# Altium PCB Solar_ESC_AM32.PcbDoc
Units mm, origin at the board's own origin, x right, y up, seen from the top; angles counter-clockwise.
Board outline 49.83 x 19.87 mm, 6 copper layers (Top Layer, GND1, Signal, Power, GND2, Bottom Layer), stack 1.597 mm thick; 69 components, 41 nets, 230 pads, 442 vias.
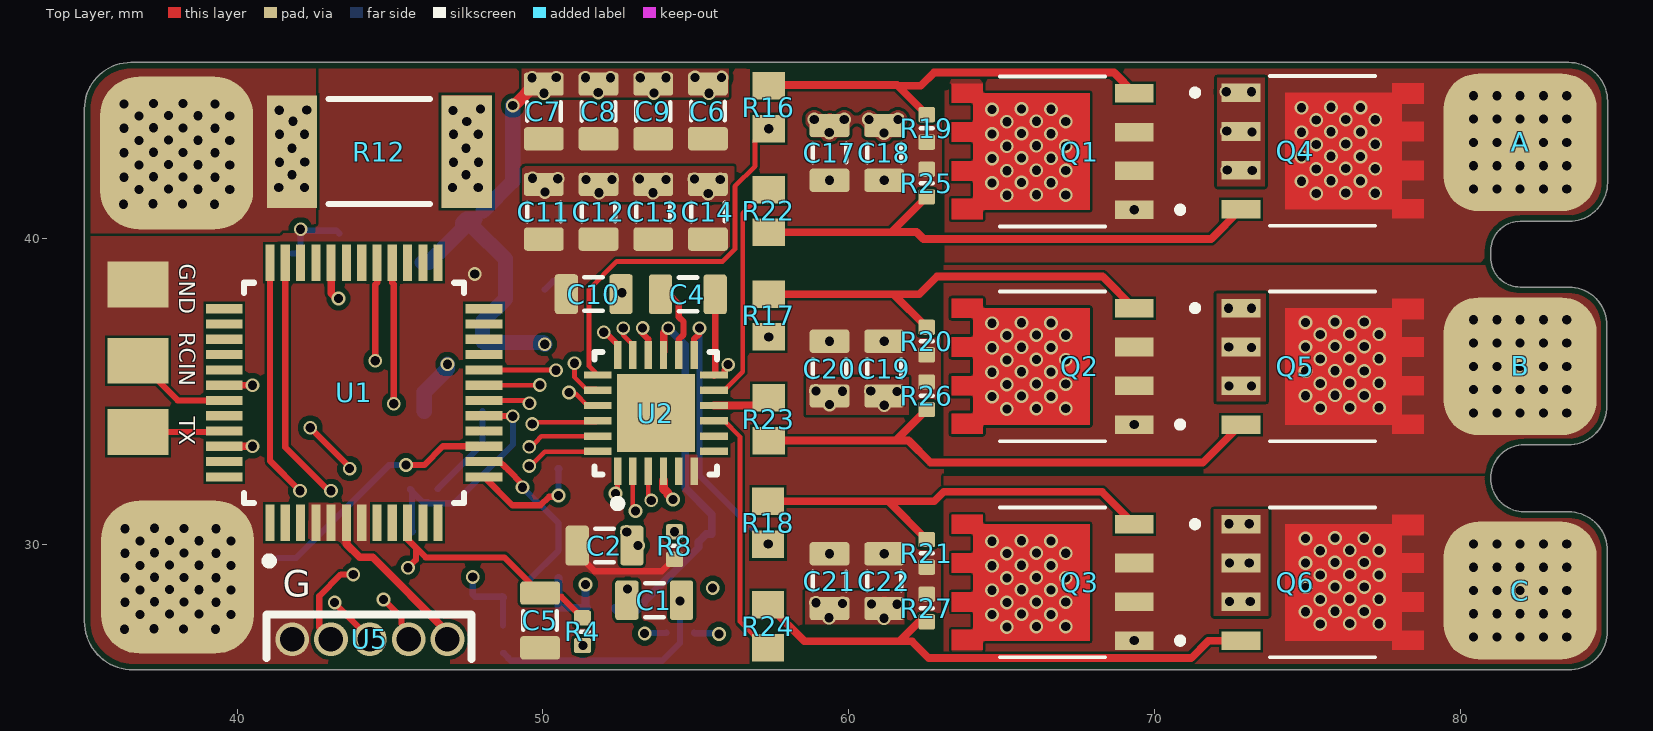
[diagram p0: Top Layer view]
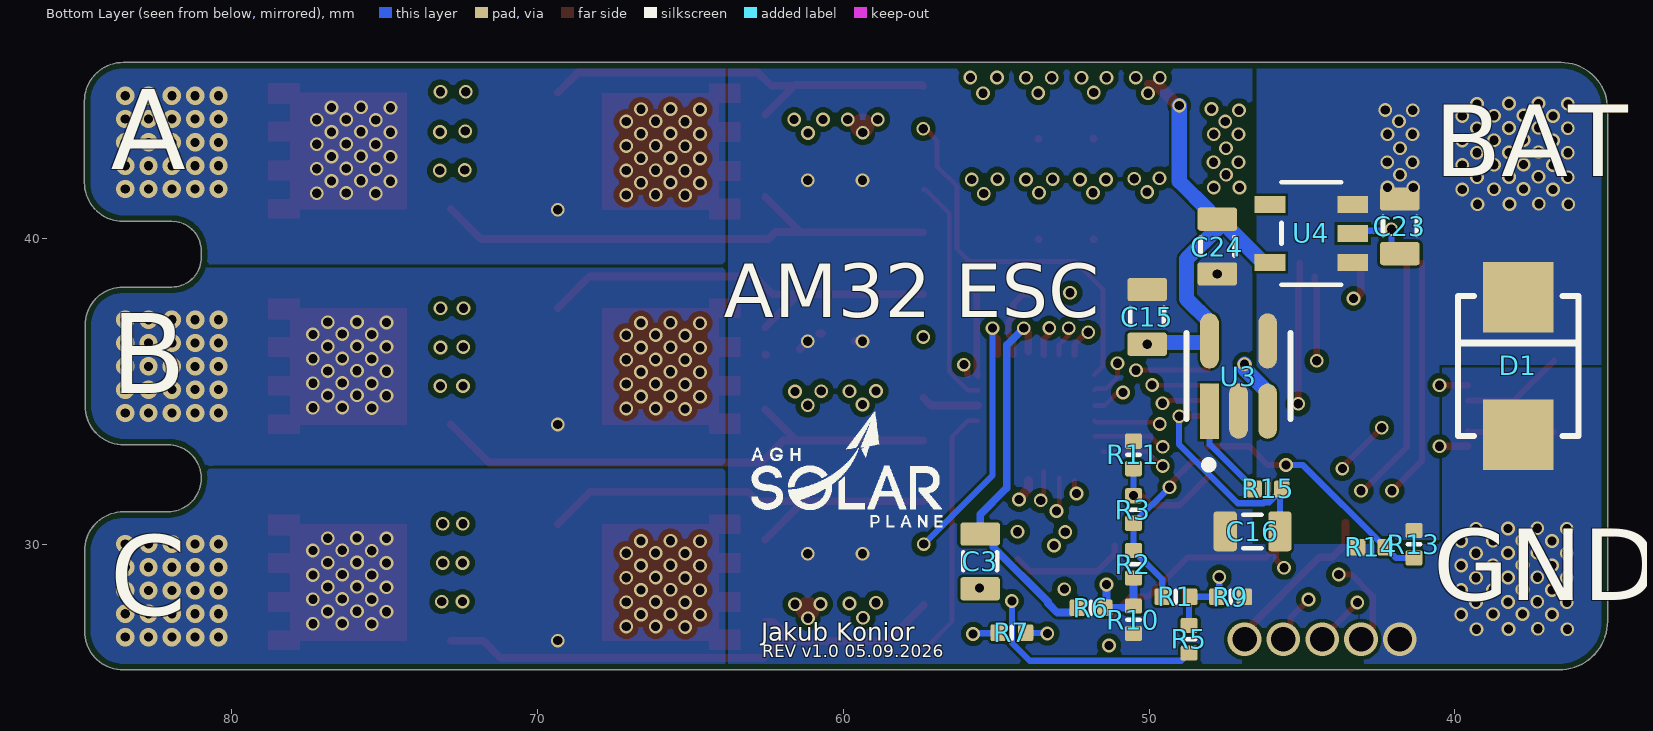
[diagram p1: Bottom Layer view, seen from below]
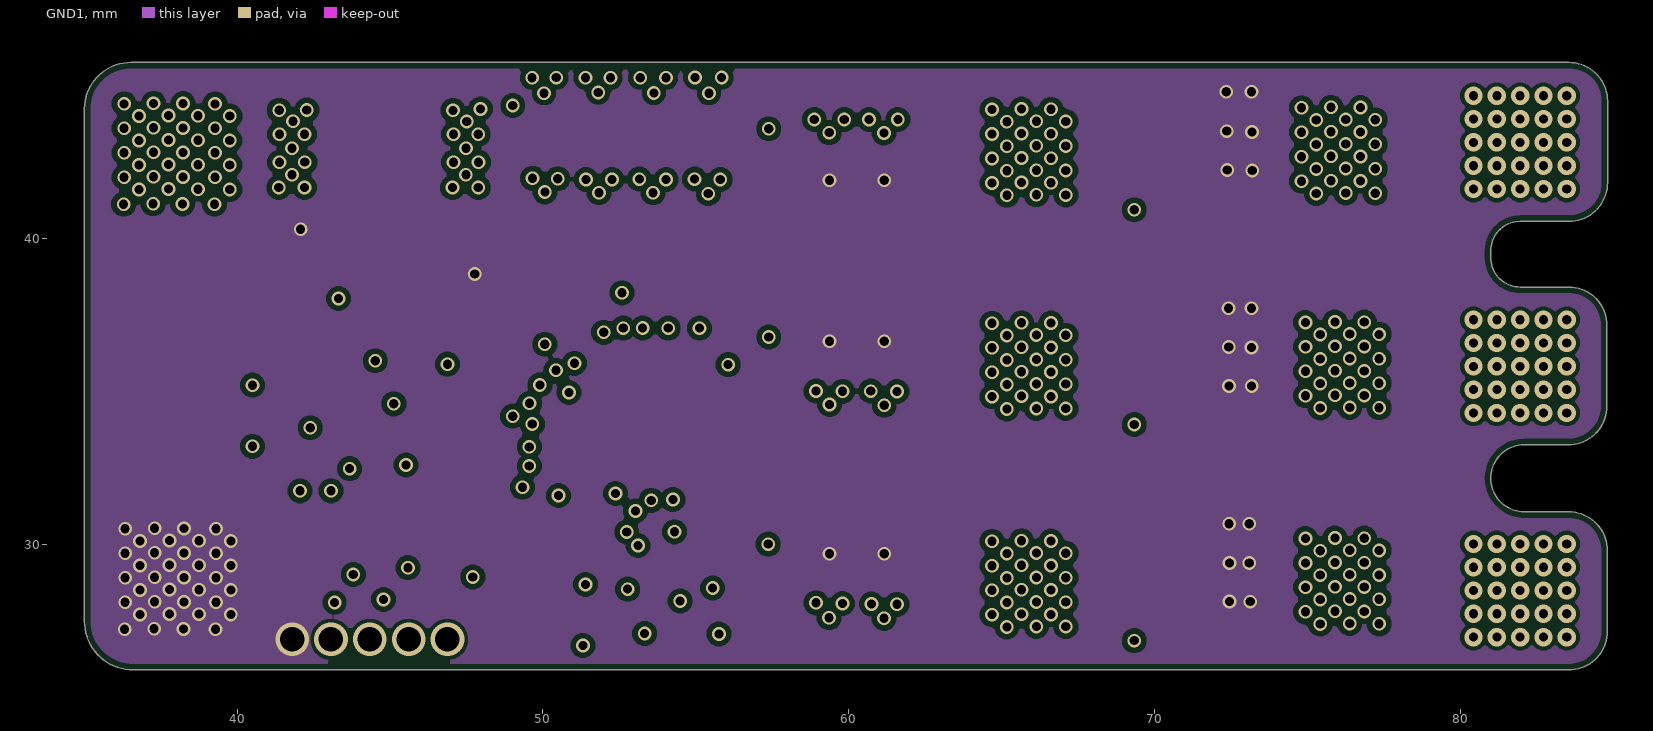
[diagram p2: GND1]
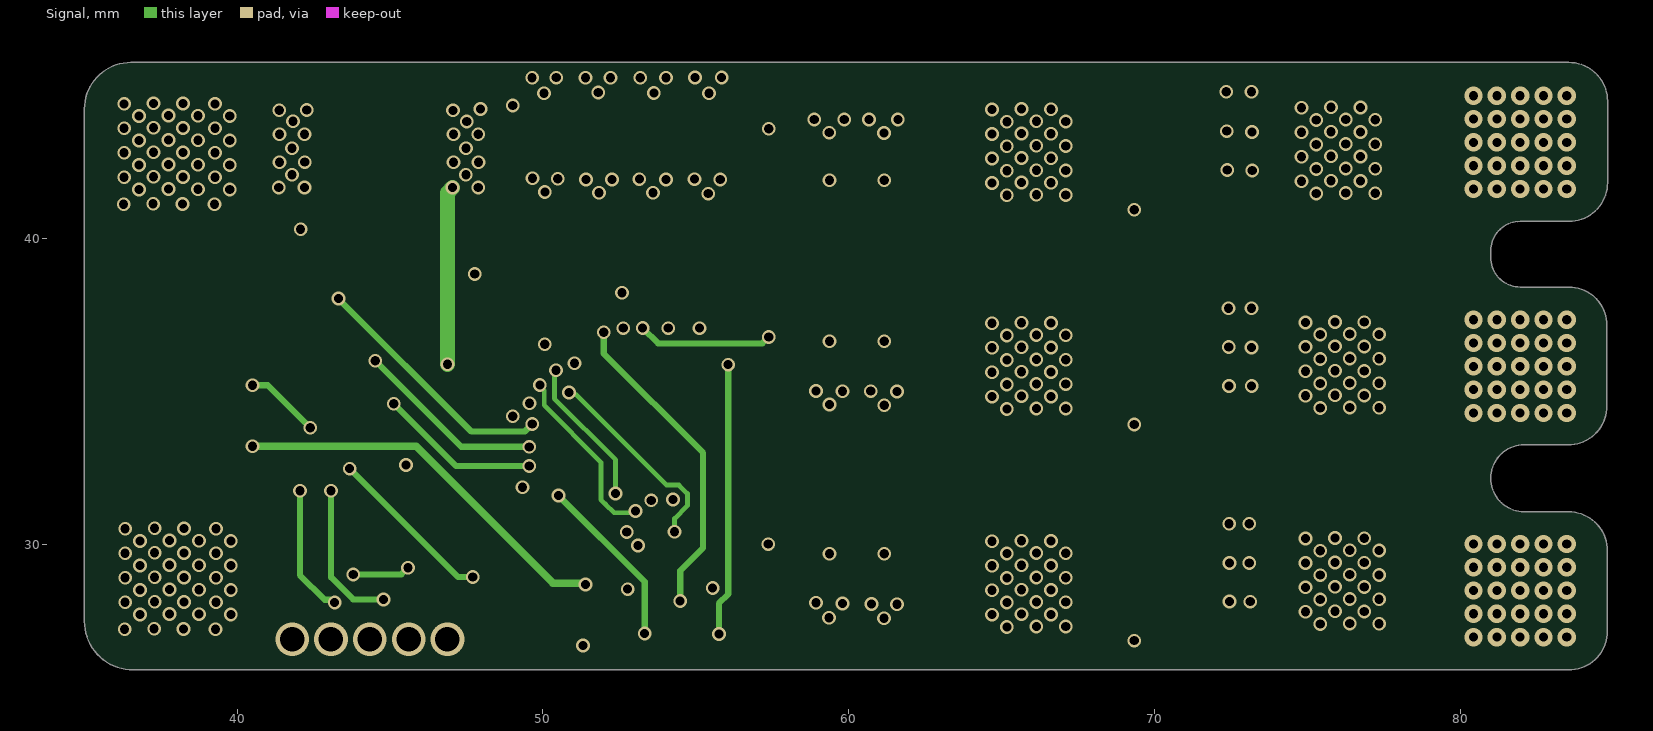
[diagram p3: Signal]
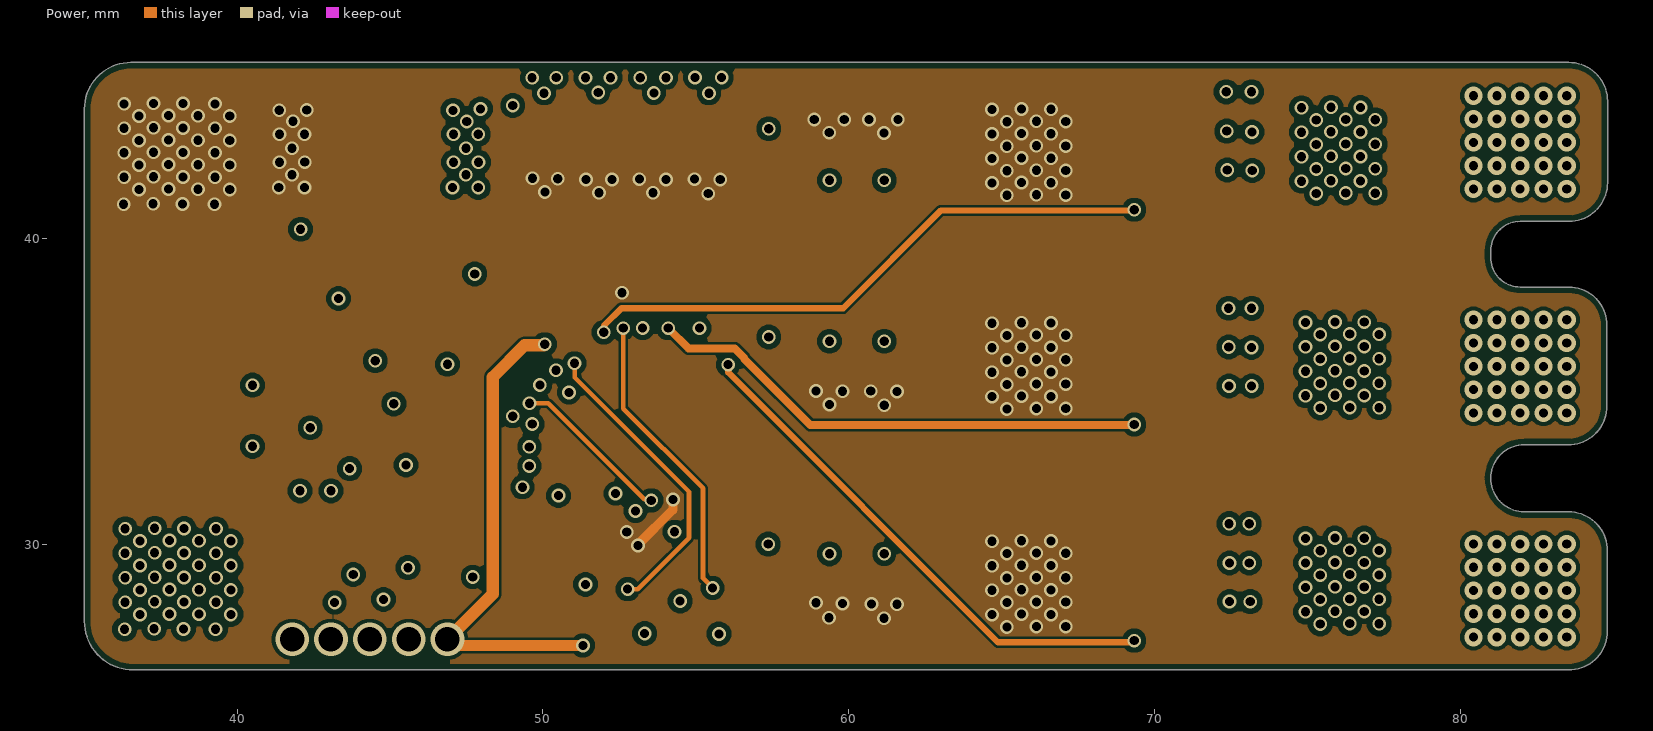
[diagram p4: Power]
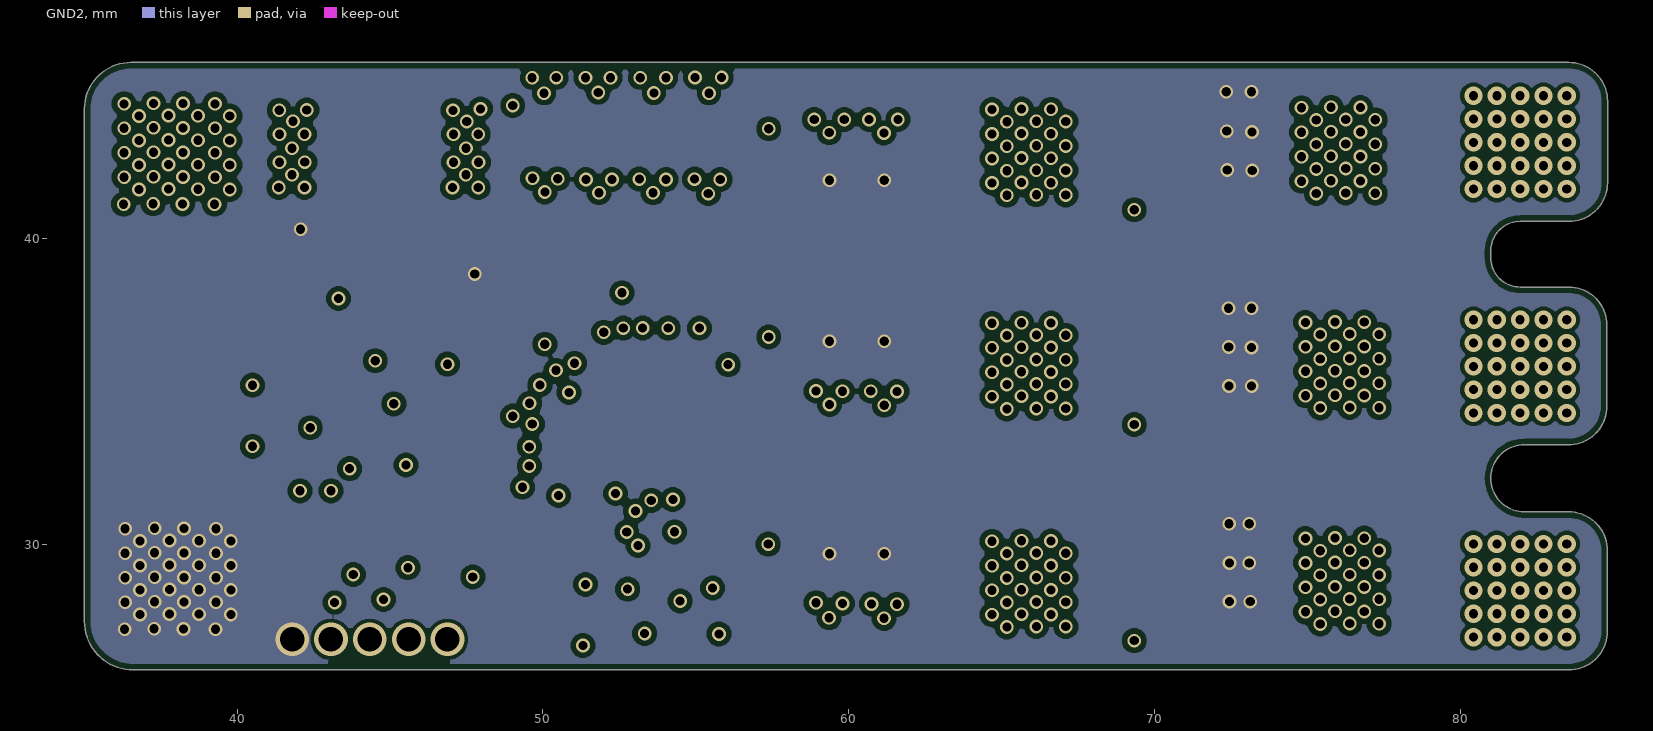
[diagram p5: GND2]
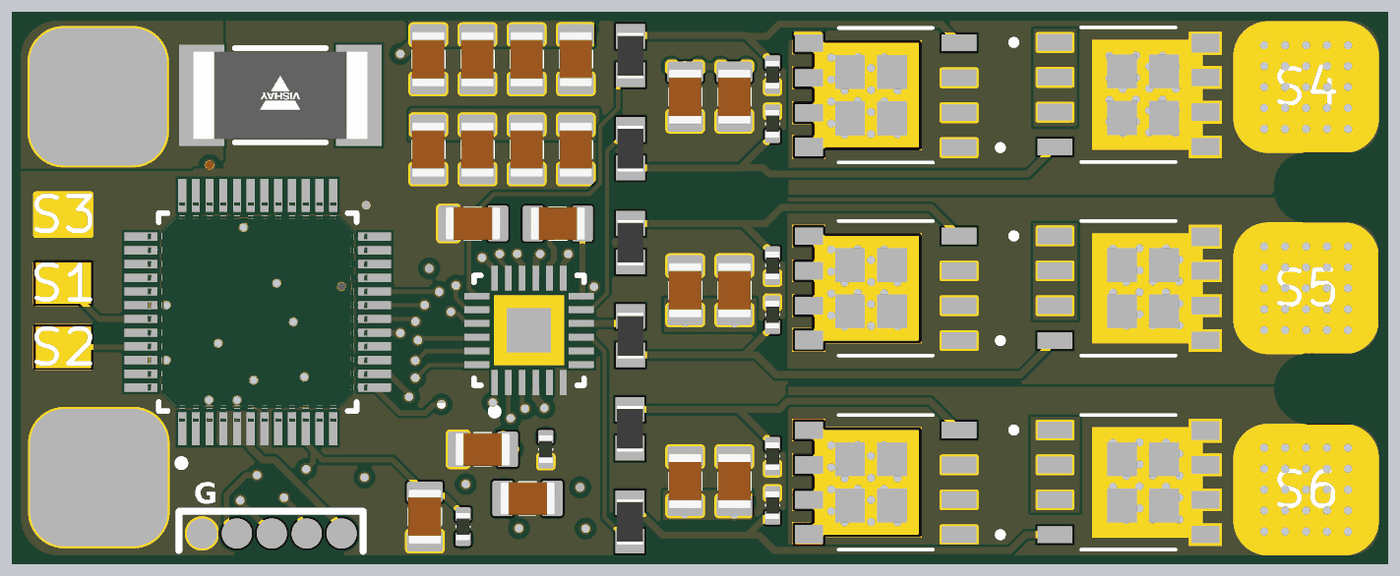
[diagram p6: 3D render of the assembled board from above, using the file's embedded part models]
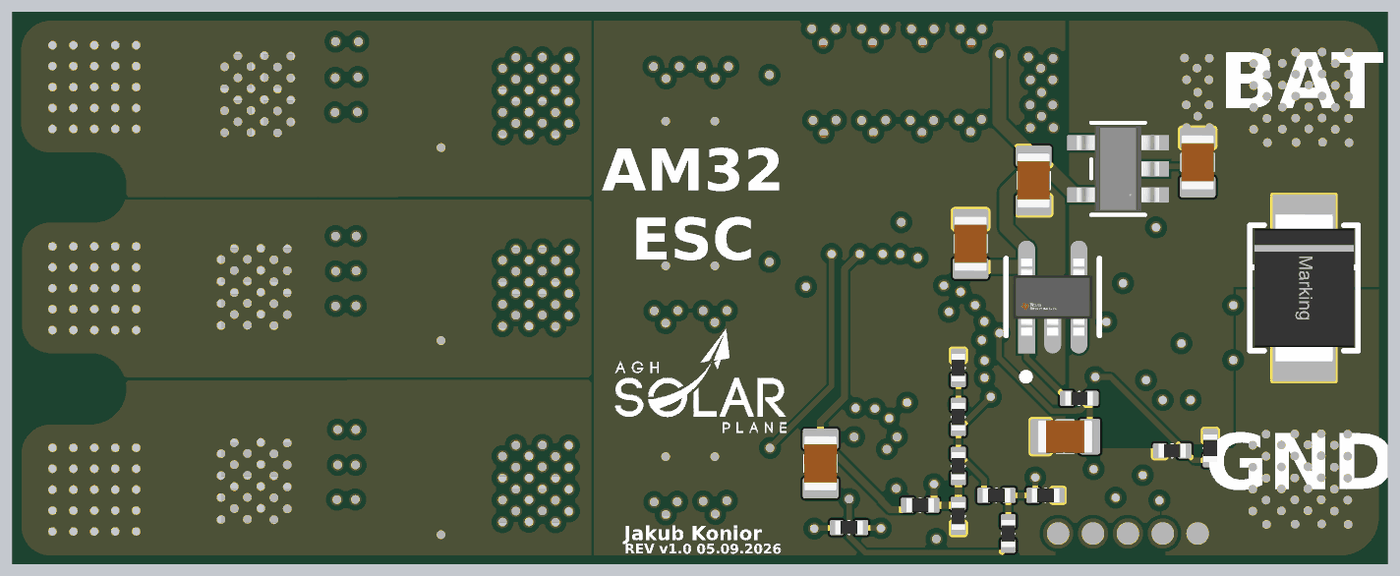
[diagram p7: 3D render of the assembled board from below, using the file's embedded part models]

## Layer stack, top to bottom
Top Solder: solder mask 0.0127, Solder Resist, Dk 3.8
Top Layer: signal copper 0.035
Dielectric 1: prepreg 0.1, 2313, Dk 4.05
GND1: signal copper 0.0175
Core 1: core 0.565, FR-4, Dk 4.5
Signal: signal copper 0.0175
Dielectric 2: prepreg 0.127, 2116, Dk 4.25
Power: signal copper 0.0175
Core 2: core 0.565, FR-4, Dk 4.5
GND2: signal copper 0.0175
Dielectric 3: prepreg 0.1, 2313, Dk 4.05
Bottom Layer: signal copper 0.035
Bottom Solder: solder mask 0.0127, Solder Resist, Dk 3.8

## Board outline
35,27.5 ccw(c36.599,27.5) 36.599,25.901 83.549,25.901 ccw(c83.549,27.171) 84.819,27.171 84.819,29.804 ccw(c83.549,29.804) 83.549,31.074 82.101,31.074 cw(c82.101,32.174) 81.001,32.174 cw(c82.092,32.174) 82.092,33.266 83.533,33.266 ccw(c83.533,34.536) 84.803,34.536 84.803,37.18 ccw(c83.555,37.18) 83.555,38.428 81.964,38.428 cw(c81.964,39.391) 81.001,39.391 81.001,39.611 cw(c81.964,39.611) 81.964,40.574 83.555,40.574 ccw(c83.555,41.844) 84.825,41.844 84.825,44.505 ccw(c83.555,44.505) 83.555,45.775 83.455,45.775 83.453,45.773 36.523,45.773 ccw(c36.523,44.25) 35,44.25

## Design rules (kind name [scope] priority, off if disabled: settings)
BoardOutlineClearance [All] p1: gap=0.2 ignorepadtopadclearanceinfootprint=FALSE
Clearance [All] p1: gap=0.089 ignorepadtopadclearanceinfootprint=FALSE except(0.127: Arc-Via Track-Via SMDPad-Via THPad-Via Via-Via Via-Fill Via-Poly Via-Region Via-Text; 0.25: Arc-Hole Track-Hole SMDPad-Hole THPad-Hole Via-Hole Fill-Hole Poly-Hole Region-Hole Text-Hole)
ComponentClearance [All] p1: gap=0.089 collisioncheckmode=3 verticalgap=0.089 showdistances=TRUE
DiffPairsRouting [All] p1: maxlimit=0.089 minlimit=0.089 mostfreqgap=0.089 toplayer_minwidth=0.089 toplayer_maxwidth=1816.048 toplayer_prefwidth=0.089 midlayer1_minwidth=0.089 midlayer1_maxwidth=1816.048 midlayer1_prefwidth=0.089 midlayer2_minwidth=0.089 midlayer2_maxwidth=1816.048 midlayer2_prefwidth=0.089 midlayer3_minwidth=0.089 midlayer3_maxwidth=1816.048 midlayer3_prefwidth=0.089 midlayer4_minwidth=0.089 midlayer4_maxwidth=1816.048 midlayer4_prefwidth=0.089 bottomlayer_minwidth=0.089 bottomlayer_maxwidth=1816.048 bottomlayer_prefwidth=0.089 maxuncoupledlength=12.7
Height [All] p1: minheight=0 maxheight=1816.048 prefheight=12.7
HoleSize [All] p1: absolutevalues=TRUE maxlimit=6.3 minlimit=0.2 maxpercent=80.000 minpercent=20.000
HoleToHoleClearance [All] p1: gap=0.25 allowstackedmicrovias=FALSE
MinimumAnnularRing [All] p1: minimumring=0.074
MinimumSolderMaskSliver [All] p1: minsoldermaskwidth=0
PlaneClearance [All] p1: clearance=0.089
PlaneConnect PlaneConnectPowerPads [InPadClass('PowerPads')] p1: planeconnectstyle=Direct reliefexpansion=0.508 reliefentries=4 reliefconductorwidth=0.254 reliefairgap=0.254
PlaneConnect [All] p2: planeconnectstyle=Direct reliefexpansion=0.3 reliefentries=4 reliefconductorwidth=0.089 reliefairgap=0.089
PolygonConnect PolygonConnectPowerPads [All vs (InPadClass('PowerPads'))] p1: connectstyle=Direct reliefconductorwidth=0.254 reliefentries=4 polygonreliefangle="90 Angle" airgapwidth=0.254
PolygonConnect [All] p2: thpad.connectstyle=Relief thpad.reliefconductorwidth=0.089 thpad.reliefentries=4 thpad.polygonreliefangle="90 Angle" thpad.airgapwidth=0.089 smdpad.connectstyle=Direct smdpad.reliefconductorwidth=0.089 smdpad.reliefentries=4 smdpad.polygonreliefangle="90 Angle" smdpad.airgapwidth=0.089 via.connectstyle=Direct via.reliefconductorwidth=0.127 via.reliefentries=4 via.polygonreliefangle="90 Angle" via.airgapwidth=0.127
RoutingVias [All] p1: holewidth=0.2 width=0.45 viastyle="Through Hole" minholewidth=0.2 minwidth=0.45 maxholewidth=6.3 maxwidth=6.55
SilkToSilkClearance [All] p1: silktosilkclearance=0
SilkToSolderMaskClearance [IsPad] p1: minsilkscreentomaskgap=0.089 clearancetoexposedcopper=TRUE
SolderMaskExpansion [All] p1: expansion=0.075 istentingtop=FALSE
SupplyNets "Schematic Supply Nets_4" [InNet('3V3')] p1: voltage=0.000
SupplyNets "Schematic Supply Nets_2" [InNet('VBAT')] p2: voltage=0.000
SupplyNets "Schematic Supply Nets_1" [InNet('VIN')] p3: voltage=0.000
SupplyNets "Schematic Supply Nets" [InNet('GND')] p4: voltage=0.000
Width [All] p1: maxlimit=1816.048 minlimit=0.089 preferedwidth=0.089
20 further rules are at their usual default settings.

## Components (designator, comment, footprint, x,y, rotation, side; value= is the part's Value field where it differs from the comment)
A "*" SOLDER_PAD_PHASE 81.964,43.159 r0 top (schematic designator S4)
B "*" SOLDER_PAD_PHASE 81.964,35.833 r0 top (schematic designator S5)
C "*" SOLDER_PAD_PHASE 81.964,28.5 r0 top (schematic designator S6)
C1 "Capacitor 0.1µF +/-40% 25V 0805" CAPC0805(2012)145_L 53.645,28.181 r0 top value=100nF
C2 "Capacitor 1µF +/-40% 25V 0805" CAPC0805(2012)145_L 52.009,29.97 r180 top value=1µF
C3 "Capacitor 0.1µF +/-40% 25V 0805" CAPC0805(2012)145_L 55.524,29.457 r90 bottom value=100nF
C4 "Capacitor 0.1µF +/-40% 25V 0805" CAPC0805(2012)145_L 54.745,38.189 r0 top value=100nF
C5 "Capacitor 100nF +/-40% 6.3V 0805" CAPC0805(2012)145_L 49.905,27.515 r270 top value=100nF
C6 "Capacitor 4.7µF +/-40% 25V 0805" CAPC0805(2012)145_L 55.397,44.18 r90 top value=4.7µF
C7 "Capacitor 0.1µF +/-40% 25V 0805" CAPC0805(2012)145_L 50.03,44.174 r90 top value=100nF
C8 "Capacitor 0.1µF +/-40% 25V 0805" CAPC0805(2012)145_L 51.819,44.174 r90 top value=100nF
C9 "Capacitor 0.1µF +/-40% 25V 0805" CAPC0805(2012)145_L 53.608,44.174 r90 top value=100nF
C10 "Capacitor 22µF +/-40% 16V 0805" CAPC0805(2012)145_L 51.656,38.195 r180 top value=22µF
C11 "Capacitor 22µF +/-40% 16V 0805" CAPC0805(2012)145_L 50.03,40.883 r270 top value=22µF
C12 "Capacitor 22µF +/-40% 16V 0805" CAPC0805(2012)145_L 51.819,40.883 r270 top value=22µF
C13 "Capacitor 22µF +/-40% 16V 0805" CAPC0805(2012)145_L 53.608,40.883 r270 top value=22µF
C14 "Capacitor 22µF +/-40% 16V 0805" CAPC0805(2012)145_L 55.397,40.883 r270 top value=22µF
C15 "Capacitor 0.1µF +/-40% 25V 0805" CAPC0805(2012)145_L 50.061,37.455 r90 bottom value=100nF
C16 "Capacitor 0.1µF +/-40% 25V 0805" CAPC0805(2012)145_L 46.62,30.434 r0 bottom value=100nF
C17 "Capacitor 100nF +/-40% 6.3V 0805" CAPC0805(2012)145_L 59.374,42.807 r270 top value=100nF
C18 "Capacitor 1µF +/-40% 25V 0805" CAPC0805(2012)145_L 61.163,42.807 r270 top value=1µF
C19 "Capacitor 100nF +/-40% 6.3V 0805" CAPC0805(2012)145_L 61.163,35.763 r90 top value=100nF
C20 "Capacitor 1µF +/-40% 25V 0805" CAPC0805(2012)145_L 59.374,35.763 r90 top value=1µF
C21 "Capacitor 100nF +/-40% 6.3V 0805" CAPC0805(2012)145_L 59.374,28.811 r90 top value=100nF
C22 "Capacitor 1µF +/-40% 25V 0805" CAPC0805(2012)145_L 61.163,28.811 r90 top value=1µF
C23 "Capacitor 2.2µF +/-40% 35V 0805" CAPC0805(2012)145_L 41.796,40.419 r90 bottom value=2.2µF
C24 "Capacitor 4.7µF +/-40% 25V 0805" CAPC0805(2012)145_L 47.766,39.757 r90 bottom value=4.7µF
D1 "824520241" WE-TVSP_DO-214AA_Unidirectional 37.923,35.844 r270 bottom
GND "*" SOLDER_PAD_SIGNAL 36.75,38.513 r0 top (schematic designator S3)
Q1 "WMB010N04LG4" TRANS_CMS42N10H8-HF 66.671,42.86 r180 top
Q2 "WMB010N04LG4" TRANS_CMS42N10H8-HF 66.671,35.833 r180 top
Q3 "WMB010N04LG4" TRANS_CMS42N10H8-HF 66.671,28.765 r180 top
Q4 "WMB010N04LG4" TRANS_CMS42N10H8-HF 75.5,42.88 r0 top
Q5 "WMB010N04LG4" TRANS_CMS42N10H8-HF 75.5,35.833 r0 top
Q6 "WMB010N04LG4" TRANS_CMS42N10H8-HF 75.5,28.765 r0 top
R1 "Resistor 10K  +/-1 % 0402 63 mW" RESC0402(1005)_L 49.12,28.293 r0 bottom value=10k
R2 "Resistor 10K  +/-1 % 0402 63 mW" RESC0402(1005)_L 50.509,29.359 r90 bottom value=10k
R3 "Resistor 10K  +/-1 % 0402 63 mW" RESC0402(1005)_L 50.509,31.147 r270 bottom value=10k
R4 "Resistor 10K  +/-1 % 0402 63 mW" RESC0402(1005)_L 51.294,27.155 r270 top value=10k
R5 "Resistor 10K  +/-1 % 0402 63 mW" RESC0402(1005)_L 48.692,26.904 r90 bottom value=10k
R6 "Resistor 10K  +/-1 % 0402 63 mW" RESC0402(1005)_L 51.898,27.934 r180 bottom value=10k
R7 "Resistor 10K  +/-1 % 0402 63 mW" RESC0402(1005)_L 54.487,27.119 r180 bottom value=10k
R8 "Resistor 100K +/-1 % 0402 63 mW" RESC0402(1005)_L 54.304,29.97 r270 top value=100k
R9 "Resistor 1K +/-5 % 0402 63 mW" RESC0402(1005)_L 47.331,28.293 r0 bottom value=1k
R10 "Resistor 1K +/-5 % 0402 63 mW" RESC0402(1005)_L 50.509,27.541 r90 bottom value=1k
R11 "Resistor 1K +/-5 % 0402 63 mW" RESC0402(1005)_L 50.509,32.936 r270 bottom value=1k
R12 "WSL25121L000FEA18" FP-WSL2512-MFG 44.647,42.86 r180 top
R13 "Resistor 100K +/-1 % 0402 63 mW" RESC0402(1005)_L 41.335,30.016 r90 bottom value=100k
R14 "Resistor 15K +/-1 % 0402 63 mW" RESC0402(1005)_L 42.724,29.913 r180 bottom value=15k
R15 "Resistor 1K +/-5 % 0402 63 mW" RESC0402(1005)_L 46.108,31.823 r0 bottom value=1k
R16 "Resistor 22R +/-1% 0603 100 mW" RESC1609X50X30ML08T20 57.385,44.304 r90 top value=22
R17 "Resistor 22R +/-1% 0603 100 mW" RESC1609X50X30ML08T20 57.385,37.494 r90 top value=22
R18 "Resistor 22R +/-1% 0603 100 mW" RESC1609X50X30ML08T20 57.367,30.716 r90 top value=22
R19 "Resistor 10K  +/-1 % 0402 63 mW" RESC0402(1005)_L 62.552,43.614 r270 top value=10k
R20 "Resistor 10K  +/-1 % 0402 63 mW" RESC0402(1005)_L 62.552,36.659 r270 top value=10k
R21 "Resistor 10K  +/-1 % 0402 63 mW" RESC0402(1005)_L 62.552,29.715 r270 top value=10k
R22 "Resistor 22R +/-1% 0603 100 mW" RESC1609X50X30ML08T20 57.385,40.915 r270 top value=22
R23 "Resistor 22R +/-1% 0603 100 mW" RESC1609X50X30ML08T20 57.385,34.105 r270 top value=22
R24 "Resistor 22R +/-1% 0603 100 mW" RESC1609X50X30ML08T20 57.367,27.327 r90 top value=22
R25 "Resistor 10K  +/-1 % 0402 63 mW" RESC0402(1005)_L 62.552,41.825 r90 top value=10k
R26 "Resistor 10K  +/-1 % 0402 63 mW" RESC0402(1005)_L 62.552,34.87 r90 top value=10k
R27 "Resistor 10K  +/-1 % 0402 63 mW" RESC0402(1005)_L 62.552,27.926 r90 top value=10k
RCIN "*" SOLDER_PAD_SIGNAL 36.75,36.015 r0 top (schematic designator S1)
TX "*" SOLDER_PAD_SIGNAL 36.75,33.684 r0 top (schematic designator S2)
U1 "STM32G071CBT6" FP-LQFP48-5B-MFG 43.822,34.966 r90 top
U2 "DRV8300DRGER" RGE0024B-IPC_B 53.692,34.301 r90 top
U3 "INA180A1IDBVR" FP-DBV0005A-IPC_A 47.072,35.515 r90 bottom
U4 "AP7375-33W5-7" SOT25_AP7375-33W5-7_DIO 44.564,40.182 r0 bottom
U5 "SWD_POGO_1x5" SWD_pogo_testpoints 41.669,26.904 r270 top

## Footprints (in the part's own frame and the unit in brackets; to place one, negate y for a bottom-side part, rotate by r counter-clockwise, add the part's x,y. Pads: shape width x height; smd on the part's side, far side on the other; paste and mask are expansions set on the pad)
CAPC0805(2012)145_L [mm] "Chip Capacitor, Body 2.0x1.2mm, Height 1.45mm, IPC High Density"
  rrect25% 0.76x1.3 smd: 1(-0.9,0) 2(0.89,0)
  silkscreen extent -0.3,-0.55 0.3,0.55, body extent -1,-0.6 1,0.6, height 1.45
FP-DBV0005A-IPC_A [mm]
  rect 1.805x0.612 smd paste+0 mask+0: 1(-1.15,0.95)
  rrect100% 1.805x0.612 smd paste+0 mask+0: 2(-1.15,0) 3(-1.15,-0.95) 4(1.15,-0.95) 5(1.15,0.95)
  silkscreen extent -3.03,-1.7 1.4,1.7, body extent -1.4,-1.45 1.4,1.45, height 1.45
FP-LQFP48-5B-MFG [mm]
  rect 1.2x0.3 smd paste+0 mask+0: 1(-4.25,2.75) 2(-4.25,2.25) 3(-4.25,1.75) 4(-4.25,1.25) 5(-4.25,0.75) 6(-4.25,0.25) 7(-4.25,-0.25) 8(-4.25,-0.75) 9(-4.25,-1.25) 10(-4.25,-1.75) 11(-4.25,-2.25) 12(-4.25,-2.75) 25(4.25,-2.75) 26(4.25,-2.25) 27(4.25,-1.75) 28(4.25,-1.25) 29(4.25,-0.75) 30(4.25,-0.25) 31(4.25,0.25) 32(4.25,0.75) 33(4.25,1.25) 34(4.25,1.75) 35(4.25,2.25) 36(4.25,2.75)
  rect 0.3x1.2 smd paste+0 mask+0: 13(-2.75,-4.25) 14(-2.25,-4.25) 15(-1.75,-4.25) 16(-1.25,-4.25) 17(-0.75,-4.25) 18(-0.25,-4.25) 19(0.25,-4.25) 20(0.75,-4.25) 21(1.25,-4.25) 22(1.75,-4.25) 23(2.25,-4.25) 24(2.75,-4.25) 37(2.75,4.25) 38(2.25,4.25) 39(1.75,4.25) 40(1.25,4.25) 41(0.75,4.25) 42(0.25,4.25) 43(-0.25,4.25) 44(-0.75,4.25) 45(-1.25,4.25) 46(-1.75,4.25) 47(-2.25,4.25) 48(-2.75,4.25)
  silkscreen extent -5.62,-3.6 3.6,3.6, body extent -4.95,-4.95 4.95,4.95, height 0.25
FP-WSL2512-MFG [mm]
  rect 1.65x3.68 smd paste+0 mask+0: 1(-2.855,0) 2(2.855,0)
  silkscreen extent -1.66,-1.72 1.66,1.72, body extent -3.78,-1.94 3.78,1.94, height 0.25
RESC0402(1005)_L [mm] "Chip Resistor, Body 1.0x0.5mm, IPC High Density"
  rrect25% 0.5x0.55 smd: 1(-0.45,0) 2(0.45,0)
  silkscreen extent 0,-0.2 0,0.2, body extent -0.5,-0.25 0.5,0.25, height 0.3
RESC1609X50X30ML08T20 [mm] "Chip Resistor, 2-Leads, Body 1.65x0.95mm, IPC Low Density"
  rect 0.9x1.05 smd: 1(-0.7,0) 2(0.7,0)
  body extent -0.82,-0.48 0.82,0.48, height 0.5
RGE0024B-IPC_B [mm]
  rect 0.91x0.242 smd paste+0 mask+0: 1(-1.901,1.25) 2(-1.901,0.75) 3(-1.901,0.25) 4(-1.901,-0.25) 5(-1.901,-0.75) 6(-1.901,-1.25) 13(1.901,-1.25) 14(1.901,-0.75) 15(1.901,-0.25) 16(1.901,0.25) 17(1.901,0.75) 18(1.901,1.25)
  rect 0.242x0.91 smd paste+0 mask+0: 7(-1.25,-1.901) 8(-0.75,-1.901) 9(-0.25,-1.901) 10(0.25,-1.901) 11(0.75,-1.901) 12(1.25,-1.901) 19(1.25,1.901) 20(0.75,1.901) 21(0.25,1.901) 22(-0.25,1.901) 23(-0.75,1.901) 24(-1.25,1.901)
  rect 2.55x2.55 smd paste-1.262 mask+0: 25(0,0)
  silkscreen extent -3.08,-2 2,2
SOLDER_PAD_PHASE [mm]
  rrect50% 5x4.5 smd paste-2539.97 mask+0.15: 1(0,0)
SOLDER_PAD_SIGNAL [mm]
  rect 2x1.5 smd paste-2539.97 mask+0.1: 1(0,0)
SOT25_AP7375-33W5-7_DIO [mil]
  rect 39.56x22 smd paste+0 mask+0: 1(-48.28,37.4) 2(-48.28,0) 3(-48.28,-37.4) 4(58.28,-37.4) 6(58.28,37.4)
  silkscreen extent -34,-66 44,66, body extent -54,-61 64,61, height 55
SWD_pogo_testpoints [mm]
  round 1.1 smd: 1(0,5.207) 2(0,3.937) 3(0,2.667) 4(0,1.397) 5(0,0.127)
TRANS_CMS42N10H8-HF [mm]
  rect 1.27x0.61 smd: 1(-2.67,1.905) 2(-2.67,0.635) 3(-2.67,-0.635) 4(-2.67,-1.905)
  round 0.025 smd: 5(0.889,0.254)
  silkscreen extent -4.27,-2.45 1.72,2.45
WE-TVSP_DO-214AA_Unidirectional [mm] "Power TVS Diode, 2-Leads. body 4.32x3.62mm"
  rect 2.3x2.3 smd: 1(-2.25,0) 2(2.25,0)
  silkscreen extent -2.28,-1.97 2.28,1.97, body extent -2.7,-1.81 2.7,1.81, height 2.38

## Part data
A B C GND RCIN TX: library part SolderPad
C1 C3 C4 C7 C8 C9 C15 C16: library part CMP-001-00091-1, "Chip Capacitor, 0.1µF +/-40%, 25V, 0805, Thickness 1.45 mm", Case/Package=0805, Max Operating Temperature=85°C, Min Operating Temperature=-55°C, Tolerance=20%, Voltage Rating=25V, Mounting Technology=SMT, Pins=2
C2 C18 C20 C22: library part CMP-001-00091-2, "Chip Capacitor, 1µF +/-40%, 25V, 0805, Thickness 1.45 mm", Case/Package=0805, Max Operating Temperature=85°C, Min Operating Temperature=-55°C, Tolerance=20%, Voltage Rating=25V, Mounting Technology=SMT, Pins=2
C5 C17 C19 C21: library part CMP-001-00085-1, "Chip Capacitor, 100nF +/-40%, 6.3V, 0805, Thickness 1.45 mm", Case/Package=0805, Max Operating Temperature=85°C, Min Operating Temperature=-55°C, Tolerance=10%, Voltage Rating=6.3V, Mounting Technology=SMT, Pins=2
C6 C24: library part CMP-001-00080-4, "Chip Capacitor, 4.7µF +/-40%, 25V, 0805, Thickness 1.45 mm", Case/Package=0805, Max Operating Temperature=85°C, Min Operating Temperature=-55°C, Tolerance=20%, Voltage Rating=25V, Mounting Technology=SMT, Pins=2
C10 C11 C12 C13 C14: library part CMP-001-00081-4, "Chip Capacitor, 22µF +/-40%, 16V, 0805, Thickness 1.45 mm", Case/Package=0805, Max Operating Temperature=85°C, Min Operating Temperature=-55°C, Tolerance=5%, Voltage Rating=16V, Mounting Technology=SMT, Pins=2
C23: library part CMP-001-00089-1, "Chip Capacitor, 2.2µF +/-40%, 35V, 0805, Thickness 1.45 mm", Case/Package=0805, Max Operating Temperature=85°C, Min Operating Temperature=-55°C, Tolerance=20%, Voltage Rating=35V, Mounting Technology=SMT, Pins=2
D1: library part CMP-03913-71101587-2, "TVS diode [Würth Elektronik] 824520241 TVS diode", Breakdown Voltage=28.1V, Clamping Voltage=38.9V, Leakage Current=1µA, Max Operating Temperature=150°C, Min Operating Temperature=-65°C, Peak Pulse Current=15.5A, Peak Pulse Power=600W, Power Line Protection=No, Reverse Standoff Voltage=24V, Composition=Zener, Height=2.4mm, Length=4.32mm, Max Breakdown Voltage=28.1V, Min Breakdown Voltage=28.1V, Mount="Surface Mount", Number of Pins=2, Number of Unidirectional Channels=1, Packaging="Cut Tape", Polarity=Unidirectional, RoHS=Compliant, Width=3.62mm
Q1 Q2 Q3 Q4 Q5 Q6: "N-MOSFET; unipolar; 40V; 268A; Idm: 1072A; 114W", Continuous Drain Current (ID)=217A, Drain to Source Voltage (Vdss)=40V, Input Capacitance=6.68nF, Max Operating Temperature=150°C, Max Power Dissipation=96W, Min Operating Temperature=-55°C, Halogen Free="Halogen Free", Lead Free="Lead Free", Max Dual Supply Voltage=40V, Mount="Surface Mount", Packaging="Tape and Reel", Rds On Max=1.2mR
R1 R2 R3 R4 R5 R6 R7 R19 R20 R21 R25 R26 R27: library part CMP-009-00149-3, "Chip Resistor, 10 kOhms, +/-1 %, 63 mW, -55 to 125 degC, 0402", Case/Package=0402, Max Operating Temperature=155°C, Min Operating Temperature=-55°C, Power=63mW, Tolerance=1%, Pins=2
R8 R13: library part CMP-009-00168-3, "Chip Resistor, 100 kOhms, +/-1 %, 63 mW, -55 to 155 degC, 0402", Case/Package=0402, Max Operating Temperature=155°C, Min Operating Temperature=-55°C, Power=63mW, Tolerance=1%, Pins=2
R9 R10 R11 R15: library part CMP-009-00157-3, "Chip Resistor, 1 kOhms, +/-5 %, 63 mW, -55 to 155 degC, 0402", Case/Package=0402, Max Operating Temperature=155°C, Min Operating Temperature=-55°C, Power=63mW, Tolerance=5%, Pins=2
R12: library part CMP-00030-41947086-1, "WSL25121L000FEA18 Res Metal Strip 2512 0.001 Ohm 1% 2W ±275ppm/C Sulfur Resistant Pad SMD Automotive T/R", Case Code (Imperial)=2512, Case Code (Metric)=6432, Max Operating Temperature=170°C, Max Power Dissipation=2W, Min Operating Temperature=-65°C, Resistance=1mΩ, Temperature Coefficient=275ppm/°C, Tolerance=1%, Case/Package=2512, Composition="Metal Element", Contact Plating=Tin, Features="Moisture Resistant", Height=889µm, Lead Free="Lead Free", Length=6.35mm, NexarPartId=41947086, Number of Pins=2512, Number of Terminations=2, Packaging="Tape and Reel", Power Rating=2W, Radiation Hardening=No, RoHS=Compliant, Schedule B="8533210045, 8533210045", Termination=SMD/SMT, Weight=63.58798mg, Width=3.2mm
R14: library part CMP-009-00168-4, "Chip Resistor, 15 kOhms, +/-1 %, 63 mW, -55 to 155 degC, 0402", Case/Package=0402, Max Operating Temperature=155°C, Min Operating Temperature=-55°C, Power=63mW, Tolerance=1%, Pins=2
R16 R17 R18 R22 R23 R24: library part CMP-009-00027-5, "Chip Resistor, 22 Ohm, +/- 1%, 100 mW, -55 to 155 degC, 0603 (1608 Metric)", Case/Package=0603, Max Operating Temperature=155°C, Min Operating Temperature=-55°C, Power=100mW, Tolerance=1%, Voltage Rating=75V, Mounting Technology=SM, Pins=2, RoHS Compliant=True
U1: library part CMP-12105-000052-1, "IC MCU 32BIT 128KB FLASH 48LQFP", Ambient Temperature Range High=+85°C, Ambient Temperature Range Low=-40°C, Frequency=64MHz, Manufacturer=STMicroelectronics, Max Junction Temp=+105°C, Max Supply Voltage=3.6V, Min Supply Voltage=1.55V, Package=LQFP48-5B, Temperature="-40°C to +85°C", Automotive=No, Category=IC, ComponentLink2Description=Datasheet, ComponentLink2URL=https://www.st.com/resource/en/datasheet/stm32g071cb.pdf, Core Architecture="ARM Cortex-M0+", Data Bus Width=32bits, Device Class L1="Integrated Circuits (ICs)", Device Class L2="Embedded Processors and Controllers", Device Class L3=Microcontrollers, Digikey Description="IC MCU 32BIT 128KB FLASH 48LQFP", Height=1.6mm, Interface=I2C,SPI,UART,USART,USB,LIN,IrDA,I2S,Other, Lead Free=Yes, Manufacturer Part Number=STM32G071CBT6, Memory Size=128KBytes, Memory Type=FLASH, Number Of A/D Converters=1, Number Of Adc Channels=17, Number Of Cores=1, Number Of I2C Channels=2, Number Of I/Os=44, Number Of Spi Channels=2, Number Of Timers/Counters=12, Number Of Uart Channels=5, Number Of Usb Channels=2, Octopart=https://octopart.com/stm32g071cbt6-stmicroelectronics-96627027, Ram Size=36KBytes, RoHS=TRUE, Standoff Height=0.05mm, Temperature Range High=+85°C, Temperature Range Low=-40°C
U2: "100-V max simple 3-phase gate driver with bootstrap diodes 24-VQFN -40 to 125", Manufacturer_Name="Texas Instruments", Copyright="Copyright (C) 2025 Ultra Librarian. All rights reserved.", Manufacturer_Part_Number=DRV8300DRGER, RefDes=RefDes, TYPE=TYPE
U3: library part CMP-04895-000140-1, "IC CURR SENSE 1 CIRCUIT SOT23-5", Case/Package=SOT-23-5, Input Bias Current=100nA, Input Offset Voltage (Vos)=100uV, Max Operating Temperature=125°C, Min Operating Temperature=-40°C, Operating Supply Current=260uA, -3db Bandwidth=350kHz, Mount="Surface Mount", Number of Circuits=1, Packaging="Tape and Reel", Slew Rate=2V/µs
U4: "Description", Manufacturer_Name="Diodes Inc", Copyright="Copyright (C) 2026 Ultra Librarian. All rights reserved.", Manufacturer_Part_Number=AP7375-33W5-7, RefDes=RefDes, TYPE=Type

## Free pads (board coordinates)
  rrect50% 5x5 smd: ""(38.019,42.807) ""(38.043,28.938)

## Via types
v1: diameter 0.45, hole 0.3, Top Layer to Bottom Layer, tented both sides, 362 vias
v2: diameter 0.6, hole 0.3, Top Layer to Bottom Layer, tented both sides, 75 vias
v3: diameter 1.1, hole 0.8, Top Layer to Bottom Layer, tented both sides, 5 vias

## Nets (pads, with @x,y where several pads share a name; then routed paths per layer and width w, separated by ;. In a path a pad name is that pad's centre, name@x,y a point inside that pad or via, vN(x,y) a via of type N, cw(c..) or ccw(c..) an arc to the next point about the centre after c; other vN are vias at no path point)
3V3: C6.2 C7.2 C8.2 C9.2 C15.1 C24.2 R4.2 U1.4 U1.5 U1.6 U3.5 U4.6 U5.1 | length 35.7
  Top Layer w0.254: U1.6 43.572,30.018 44.006,29.584 44.43,29.584 46.876,27.138 v3(46.876,26.904) ; v1(49.012,44.367) v1@49.062,44.367 ; C7.2@49.76,45.064 C7.2
  Top Layer w0.4: v1@49.062,44.367 C7.2@49.76,45.064
  Power w0.35: v3(46.876,26.904) 47.106,26.904 47.307,26.704 v1(51.307,26.704)
  Power w0.4: v3(46.876,26.904) 48.356,28.385 48.356,35.478 49.398,36.519 50.025,36.519 v1(50.061,36.555)
  Bottom Layer w0.5: U4.6 U4.6@46.267,39.232 ; U4.6@46.296,39.261 U4.6@46.267,39.232 ; C24.2@47.731,40.651 47.731,40.381 48.772,39.34 48.772,38.042 48.022,37.292 U3.5 48.022,36.662 48.074,36.61 50.005,36.61 v1(50.061,36.555) ; C24.2 47.496,40.647 47.366,40.517 47.366,40.331 U4.6@46.267,39.232 ; C24.2@48.035,40.911 49.012,41.887 v1(49.012,44.367)
  other v1: 50.037,44.766 55.429,44.766 51.807,44.791 53.628,44.775 49.647,45.274 50.436,45.275 51.391,45.274 52.213,45.274 53.182,45.274 54.029,45.274 54.974,45.28 55.845,45.28
BEMF_A: R1.1 R5.2 R9.2 U1.42 | length 13.3
  Top Layer w0.203: U1.42 v1(40.5,35.216) ; v1(42.388,33.824) 43.676,32.536 v1(43.676,32.486)
  Signal w0.203: v1(40.5,35.216) 40.996,35.216 v1(42.388,33.824) ; v1(43.676,32.486) 47.218,28.945 v1(47.706,28.945)
  Bottom Layer w0.203: v1(47.706,28.945) 47.706,28.368 R9.2 48.67,28.293 48.692,28.272 R5.2
  Bottom Layer w0.254: R1.1@48.67,28.293 R1.1@48.692,28.272
BEMF_B: R2.1 R6.2 R10.2 U1.46 | length 16.4
  Top Layer w0.254: U1.46 v1(40.5,33.216)
  Signal w0.254: v1(40.5,33.216) 45.856,33.216 50.332,28.74 v1@51.391,28.74
  Bottom Layer w0.254: R2.1 R10.2 50.567,27.934 R6.2 ; v1(51.391,28.7) R6.2@51.391,27.991 ; R6.2@51.39,27.991 R6.2 ; R6.2@51.391,27.991 R6.2
BEMF_C: R3.1 R7.2 R11.2 U1.13 | length 10.3
  Top Layer w0.203: U1.13 49,31.288 49.919,31.288 50.2,31.569 v1@50.512,31.569
  Signal w0.203: v1(50.508,31.604) 53.327,28.786 v1(53.327,27.093)
  Bottom Layer w0.203: R11.2 R3.1 R3.1 v1(50.508,31.604) R3.1@50.535,31.631 ; v1(53.327,27.093) 53.339,27.106 54.024,27.106 R7.2
BEMF_COM: R1.2 R2.2 R3.2 U1.14 | length 6.2
  Top Layer w0.203: U1.14 48.591,32.716 48.751,32.557 48.862,32.445 49.328,31.979 v1(49.328,31.879)
  Bottom Layer w0.203: v1@49.328,31.948 v1(49.328,31.879) R3.2 R2.2 49.57,28.87 R1.2
GHA: R16.1 U2.19 | length 12.7
  Top Layer w0.154: U2.19 51.509,35.833 51.509,38.357 52.415,39.263 55.875,39.263 56.28,39.668 56.28,41.72 56.937,42.377 56.937,43.231 57.311,43.604 v1(57.385,43.604)
GHB: R17.1 U2.16 | length 5.4
  Top Layer w0.203: v1(53.261,37.085) 53.207,37.03 53.207,36.965 53.447,36.725 53.447,36.207 U2.16
  Signal w0.203: v1(53.261,37.085) 53.765,36.581 57.172,36.581 v1(57.385,36.794)
GHC: R18.1 U2.13 | length 9
  Top Layer w0.203: U2.13 54.94,36.204 54.94,36.721 55.122,36.904 v1(55.122,37.082)
  Bottom Layer w0.203: v1(55.122,37.082) 55.122,32.261 v1(57.367,30.016)
GLA: R22.1 U2.11 | length 7.5
  Top Layer w0.154: U2.11 55.927,35.051 56.535,35.658 56.535,40.84 57.31,41.615 R22.1
GLB: R23.1 U2.10 | length 2.3
  Top Layer w0.203: R23.1@57.125,34.545 R23.1
  Top Layer w0.254: U2.10 57.131,34.551 R23.1
GLC: R24.1 U2.9 | length 8.4
  Top Layer w0.154: U2.9 55.927,34.051 56.445,33.533 56.445,27.474 57.292,26.627 R24.1
GND: C2.2 C5.2 C6.1 C7.1 C8.1 C9.1 C10.2 C11.2 C12.2 C13.2 C14.2 C15.2 C16.2 C17.2 C18.2 C19.2 C20.2 C21.2 C22.2 C23.1 C24.1 D1.2 GND.1 pad.@38.043,28.938 Q4.1 Q4.2 Q4.3 Q5.1 Q5.2 Q5.3 Q6.1 Q6.2 Q6.3 R8.2 R9.1 R10.1 R11.1 R14.1 R19.2 R20.2 R21.2 R25.2 R26.2 R27.2 U1.7 U2.6 U3.2 U4.2 U5.5 | length 7.3
  Top Layer w0.203: C2.2 51.119,29.7 51.689,29.13 53.888,29.13 54.279,29.52 R8.2
  Top Layer w0.254: C9.1 C9.1@53.613,43.28 ; v1(59.374,36.653) C20.2@59.644,36.653 ; C19.2@60.699,36.906 C19.2@60.789,36.906 ; v1(61.163,36.653) C19.2@61.416,36.4 ; R20.2@62.527,36.209 R20.2
  Bottom Layer w0.203: C23.1 41.933,39.519 42.074,39.66 v1(42.074,40.317) 42.121,40.27 43.249,40.27 U4.2 ; C15.2 C15.2@50.339,38.623
  other v1: 36.318,27.235 39.29,27.235 37.282,27.251 38.246,27.243 36.819,27.719 39.791,27.719 37.783,27.735 38.747,27.727 36.334,28.119 38.262,28.127 39.306,28.119 37.298,28.135 72.461,28.141 73.134,28.135 36.819,28.519 37.783,28.535 38.747,28.527 39.791,28.519 36.334,28.919 37.298,28.935 38.262,28.927 39.306,28.919 36.819,29.319 39.791,29.319 37.783,29.335 38.747,29.327 72.455,29.399 73.105,29.399 59.374,29.701 61.163,29.701 36.334,29.719 38.262,29.727 39.306,29.719 37.298,29.735 36.819,30.119 37.783,30.135 38.747,30.127 39.791,30.119 36.334,30.519 37.298,30.535 38.262,30.527 39.306,30.519 72.446,30.686 73.101,30.686 73.181,35.187 72.44,35.193 73.175,36.45 72.434,36.467 73.18,37.731 72.428,37.733 47.766,38.857 59.374,41.917 61.163,41.917 73.204,42.235 72.386,42.253 73.194,43.499 72.367,43.526 72.349,44.813 73.18,44.813
  other v3: 41.796,26.904
I_SENSE: C16.1 R15.1 U1.17 | length 7.7
  Top Layer w0.203: U1.17 48.079,34.209 49.004,34.209 v1(49.011,34.202)
  Bottom Layer w0.203: C16.1 45.72,31.761 R15.1 45.658,31.798 46.067,31.389 46.235,31.389 46.266,31.358 47.1,31.358 49.022,33.279 v1@49.022,34.192
  Bottom Layer w0.254: C16.1@45.658,30.497 C16.1
NetC1_1: C1.1 U2.20 | length 11.4
  Top Layer w0.154: v1(51.032,35.932) 51.032,35.471 51.408,35.095 51.747,35.095 U2.20
  Power w0.154: v1(51.032,35.932) 51.036,35.928 51.036,35.468 54.781,31.723 54.781,30.223 53.97,29.412 53.102,28.545 v1(52.77,28.545)
NetC3_1: C3.1 U2.17 | length 10.7
  Top Layer w0.154: v1(52.626,37.082) 52.626,36.852 52.942,36.536 U2.17
  Power w0.154: v1(52.626,37.082) 52.626,34.452 55.237,31.841 55.237,28.897 v1(55.55,28.584)
NetC4_1: C4.1 U2.14 | length 2.5
  Top Layer w0.203: C4.1 54.122,38.189 54.442,37.869 54.442,37.446 54.599,37.29 54.599,36.874 54.442,36.718 U2.14
NetQ1_4: Q1.4 R16.2 R19.1 | length 13.8
  Top Layer w0.254: R16.2 57.419,45.038 61.579,45.038 ; R19.1 61.579,45.038 ; Q1.4@69.341,44.785 68.68,45.446 62.794,45.446 62.355,45.007 61.609,45.007 61.579,45.038
NetQ2_4: Q2.4 R17.2 R20.1 | length 14.2
  Top Layer w0.254: R17.2 61.467,38.194 ; R20.1 61.467,38.194 ; Q2.4 68.303,38.776 62.893,38.776 62.311,38.194 61.467,38.194
NetQ3_4: Q3.4 R18.2 R21.1 | length 14.3
  Top Layer w0.254: R18.2 61.301,31.416 ; R21.1 61.301,31.416 ; Q3.4 68.284,31.727 63.107,31.727 62.796,31.416 61.301,31.416
NetQ4_4: Q4.4 R22.2 R25.1 | length 17.6
  Top Layer w0.254: R22.2 61.392,40.215 ; R25.1 61.392,40.215 ; Q4.4 71.855,40 62.448,40 62.22,40.228 61.405,40.228 61.392,40.215
NetQ5_4: Q5.4 R23.2 R26.1 | length 17.7
  Top Layer w0.254: R23.2 61.537,33.405 ; R26.1 61.537,33.405 ; Q5.4 71.585,32.683 62.679,32.683 61.957,33.405 61.537,33.405
NetQ6_4: Q6.4 R24.2 R27.1 | length 17.6
  Top Layer w0.254: R24.2 58.557,26.838 61.663,26.838 ; R27.1 62.302,27.476 61.663,26.838 ; Q6.4 71.772,26.86 71.2,26.288 62.618,26.288 62.068,26.838 61.663,26.838
NetR8_1: R8.1 U2.21 | length 7.8
  Top Layer w0.154: v1(50.852,34.976) 50.897,34.931 51.077,34.931 51.457,34.551 U2.21
  Signal w0.154: v1(50.852,34.976) 50.906,34.923 51.072,34.923 54.044,31.951 54.447,31.951 54.727,31.671 54.727,31.276 54.304,30.853 v1(54.304,30.42)
NetR15_2: R15.2 U3.1 | length 3.1
  Bottom Layer w0.203: R15.2 48.022,33.287 U3.1
NRST: C5.1 R4.1 U1.10 U5.4 | length 13
  Top Layer w0.203: v3(43.066,26.904) 42.685,27.285 42.685,28.317 43.393,29.024 v1(43.796,29.024) ; U1.10 45.572,30.282 45.52,30.23 45.844,29.907 ; v1(45.583,29.245) 45.844,29.506 45.844,29.907 ; R4.1 51.269,27.605 51.12,27.753 51.12,27.778 50.597,28.301 50.019,28.301 C5.1 48.736,29.584 46.167,29.584 45.844,29.907
  Signal w0.203: v1(43.796,29.024) 45.362,29.024 v1(45.583,29.245)
PHASE_A: A.1 C1.2 Q1.1 Q1.2 Q1.3 Q4.5 R5.1 U2.18 | length 38.1
  Top Layer w0.203: v1(51.986,36.945) 52.033,36.945 52.442,36.536 U2.18 ; v1(54.487,28.157) 54.51,28.157 C1.2
  Signal w0.203: v1(51.986,36.945) 51.986,36.252 55.237,33.001 55.237,29.896 54.49,29.149 54.49,28.159 v1(54.487,28.157)
  Power w0.203: v1(51.986,36.945) 52.005,36.964 52.005,37.17 52.57,37.736 59.823,37.736 63.018,40.93 69.316,40.93 v1(69.341,40.955)
  Bottom Layer w0.203: R5.1 48.717,26.454 48.865,26.306 48.865,26.281 48.944,26.202 53.905,26.202 54.487,26.785 v1(54.487,28.157)
  other v1: 75.295,41.489 76.26,41.505 77.223,41.497 74.81,41.889 76.738,41.897 75.775,41.905 75.295,42.289 77.223,42.297 76.26,42.305 74.81,42.689 75.775,42.705 76.738,42.697 75.295,43.089 76.26,43.105 77.223,43.097 74.81,43.489 76.738,43.497 75.775,43.505 75.295,43.889 77.223,43.897 76.26,43.905 74.81,44.289 75.775,44.305 76.738,44.297
  other v2: 80.44,41.635 81.202,41.635 81.964,41.635 82.726,41.635 83.488,41.635 80.44,42.397 81.202,42.397 81.964,42.397 82.726,42.397 83.488,42.397 80.44,43.159 81.202,43.159 81.964,43.159 82.726,43.159 83.488,43.159 80.44,43.921 81.202,43.921 81.964,43.921 82.726,43.921 83.488,43.921 80.44,44.683 81.202,44.683 81.964,44.683 82.726,44.683 83.488,44.683
PHASE_A_HIGH: U1.32 U2.22 | length 11.7
  Top Layer w0.154: v1(49.652,33.944) 49.732,33.944 49.794,34.007 51.747,34.007 U2.22
  Top Layer w0.254: U1.32 43.072,38.225 43.247,38.05 v1(43.311,38.05)
  Signal w0.203: v1(43.311,38.05) 47.66,33.701 49.408,33.701 v1(49.652,33.944)
PHASE_A_LOW: U1.20 U2.1 | length 7.7
  Top Layer w0.154: U1.20 48.077,35.711 50.421,35.711 v1(50.427,35.705) ; v1(52.375,31.671) 52.438,31.734 U2.1@52.438,32.105
  Signal w0.154: v1(50.427,35.705) 50.375,35.654 50.375,34.779 52.375,32.779 v1(52.375,31.671)
PHASE_B: B.1 C3.2 Q2.1 Q2.2 Q2.3 Q5.5 R6.1 U2.15 | length 29.2
  Top Layer w0.254: U2.15@53.95,36.31 53.95,36.934 v1(54.097,37.082)
  Power w0.254: v1(54.097,37.082) 54.764,36.415 56.276,36.415 56.585,36.107 56.585,36.074 58.745,33.914 69.328,33.914 v1(69.341,33.928)
  Bottom Layer w0.254: R6.1 52.348,27.909 52.471,27.786 52.552,27.786 52.561,27.777 52.997,27.777 53.306,28.086 53.306,28.129 55.091,29.915 55.091,30.094 55.344,30.347 C3.2 55.524,30.985 54.652,31.856 54.652,36.527 v1(54.097,37.082)
  other v1: 75.424,34.47 77.352,34.479 76.389,34.487 74.939,34.87 75.904,34.887 76.867,34.879 75.424,35.27 76.389,35.287 77.352,35.279 74.939,35.67 75.904,35.687 76.867,35.679 75.424,36.07 77.352,36.079 76.389,36.087 74.939,36.47 75.904,36.487 76.867,36.479 75.424,36.87 76.389,36.887 77.352,36.879 74.939,37.27 75.904,37.287 76.867,37.279
  other v2: 80.44,34.309 81.202,34.309 81.964,34.309 82.726,34.309 83.488,34.309 80.44,35.071 81.202,35.071 81.964,35.071 82.726,35.071 83.488,35.071 80.44,35.833 81.202,35.833 81.964,35.833 82.726,35.833 83.488,35.833 80.44,36.595 81.202,36.595 81.964,36.595 82.726,36.595 83.488,36.595 80.44,37.357 81.202,37.357 81.964,37.357 82.726,37.357 83.488,37.357
PHASE_B_HIGH: U1.29 U2.23 | length 11.6
  Top Layer w0.154: v1@49.554,33.347 v1(49.554,33.199) 49.603,33.199 49.761,33.357 49.767,33.357 49.949,33.54 ; 49.946,33.542 50.059,33.542 ; 49.951,33.542 50.059,33.542 ; U2.23@51.782,33.542 50.059,33.542
  Top Layer w0.203: v1(44.514,36.015) 44.514,38.509 44.577,38.572 U1.29@44.577,38.776
  Signal w0.203: v1(44.514,36.015) 47.33,33.199 v1(49.554,33.199)
PHASE_B_LOW: U1.19 U2.2 | length 8.9
  Top Layer w0.154: U1.19 48.073,35.218 49.896,35.218 v1(49.898,35.22) ; U2.2@52.939,32.186 52.939,31.187 v1(53.026,31.101)
  Signal w0.154: v1(49.898,35.22) 49.898,35.184 50.039,35.043 50.039,34.558 51.898,32.7 51.898,31.869 51.898,31.474 52.044,31.328 52.325,31.046 52.971,31.046 v1(53.026,31.101)
PHASE_C: C4.2 C.1 Q3.1 Q3.2 Q3.3 Q6.5 R7.1 U2.12 | length 30.1
  Top Layer w0.203: U2.12@55.606,35.523 55.635,35.552 C4.2 ; U2.12@55.921,35.545 55.947,35.571 55.947,35.711 56.058,35.821 v1(56.058,35.888)
  Signal w0.203: v1(55.754,27.081) 55.754,28.079 56.058,28.382 v1(56.058,35.888)
  Power w0.203: v1(56.058,35.888) 56.058,35.633 64.881,26.809 69.158,26.809 69.162,26.813 69.294,26.813 v1(69.341,26.86)
  Bottom Layer w0.203: R7.1 54.956,27.1 55.736,27.1 v1(55.754,27.081)
  other v1: 75.424,27.403 77.352,27.411 76.389,27.419 74.939,27.803 75.904,27.819 76.867,27.811 75.424,28.203 76.389,28.219 77.352,28.211 74.939,28.603 76.867,28.611 75.904,28.619 75.424,29.003 76.389,29.019 77.352,29.011 74.939,29.403 75.904,29.419 76.867,29.411 75.424,29.803 76.389,29.819 77.352,29.811 74.939,30.203 76.867,30.211 75.904,30.219
  other v2: 80.44,26.976 81.202,26.976 81.964,26.976 82.726,26.976 83.488,26.976 80.44,27.738 81.202,27.738 81.964,27.738 82.726,27.738 83.488,27.738 80.44,28.5 81.202,28.5 81.964,28.5 82.726,28.5 83.488,28.5 80.44,29.262 81.202,29.262 81.964,29.262 82.726,29.262 83.488,29.262 80.44,30.024 81.202,30.024 81.964,30.024 82.726,30.024 83.488,30.024
PHASE_C_HIGH: U1.28 U2.24 | length 12.1
  Top Layer w0.154: v1@49.554,32.633 v1(49.554,32.574) 49.603,32.574 50.065,33.036 U2.24@51.515,33.036
  Top Layer w0.203: U1.28 45.072,38.566 45.122,38.516 v1(45.122,34.607)
  Signal w0.203: v1(45.122,34.607) 47.155,32.574 v1(49.554,32.574)
PHASE_C_LOW: U1.18 U2.3 | length 8
  Top Layer w0.154: U1.18 49.388,34.716 49.481,34.624 v1(49.561,34.624) ; v1@53.423,31.501 53.503,31.421 53.531,31.449 v1(53.544,31.449) 53.442,31.551 U2.3
  Power w0.154: v1(49.561,34.624) 50.177,34.624 53.319,31.481 53.512,31.481 v1(53.544,31.449)
RCIN: RCIN.1 U1.43 | length 3.4
  Top Layer w0.203: RCIN.1 38.049,34.716 U1.43
SWCLK: U1.36 U5.3 | length 13.7
  Top Layer w0.203: U1.36 41.072,32.741 v1(42.052,31.761) ; v1(43.187,28.106) 43.187,28.08 44.082,27.185 U5.3@44.082,26.904
  Signal w0.203: v1(42.052,31.761) 42.052,29.006 42.859,28.199 43.028,28.199 43.12,28.106 v1(43.187,28.106)
  other v3: 44.336,26.904
SWDIO: U1.35 U5.2 | length 14.6
  Top Layer w0.203: U1.35 41.572,33.188 42.998,31.761 v1(43.068,31.761) ; v1(44.782,28.209) 45.37,27.621 45.37,27.411 45.606,27.174 v3(45.606,26.904)
  Signal w0.203: v1(43.068,31.761) 43.068,28.934 43.793,28.209 v1(44.782,28.209)
TELEM_TX: TX.1 U1.45 | length 2.8
  Top Layer w0.203: TX.1 39.54,33.684 U1.45
V_SENSE: R13.1 R14.2 U1.15 | length 8.2
  Top Layer w0.203: v1(45.52,32.603) 46.117,32.603 46.73,33.216 U1.15
  Bottom Layer w0.203: R13.1 41.927,29.566 R14.2 44.964,32.603 v1(45.52,32.603)
VBAT: C2.1 C10.1 C11.1 C12.1 C13.1 C14.1 C17.1 C18.1 C19.1 C20.1 C21.1 C22.1 C23.2 D1.1 pad.@38.019,42.807 Q1.5 Q2.5 Q3.5 R12.2 R13.2 U2.4 U3.4 U4.1 U4.3 | length 2.7
  Top Layer w0.3: U2.4@53.942,32.088 53.942,31.83 54.094,31.677 54.094,31.636 54.25,31.481 v1(54.25,31.474)
  Power w0.3: v1(53.109,29.97) 53.109,30.004 54.25,31.144 v1(54.25,31.474)
  other v1: 65.174,27.311 66.139,27.327 67.102,27.319 61.158,27.591 59.36,27.611 64.689,27.711 66.617,27.719 65.654,27.727 61.58,28.048 59.797,28.077 60.744,28.061 58.935,28.099 65.174,28.111 66.139,28.127 67.102,28.119 64.689,28.511 65.654,28.527 66.617,28.519 65.174,28.911 66.139,28.927 67.102,28.919 64.689,29.311 66.617,29.319 65.654,29.327 65.174,29.711 66.139,29.727 67.102,29.719 64.689,30.111 65.654,30.127 66.617,30.119 52.742,30.416 65.174,34.441 67.102,34.45 66.139,34.458 61.164,34.561 59.376,34.586 64.689,34.841 65.654,34.858 66.617,34.85 61.579,35.007 58.935,35.023 59.797,35.015 60.724,35.022 65.174,35.241 66.139,35.258 67.102,35.25 64.689,35.641 65.654,35.658 66.617,35.65 65.174,36.041 67.102,36.05 66.139,36.058 64.689,36.441 65.654,36.458 66.617,36.45 65.174,36.841 66.139,36.858 67.102,36.85 64.689,37.241 65.654,37.258 66.617,37.25 52.587,38.237 36.284,41.135 39.256,41.135 37.249,41.151 38.212,41.143 65.174,41.431 67.102,41.44 66.139,41.448 55.409,41.482 51.832,41.511 53.602,41.511 50.063,41.533 36.785,41.618 37.75,41.635 38.714,41.627 39.757,41.618 41.359,41.682 42.199,41.682 64.689,41.831 66.617,41.84 65.654,41.848 51.406,41.945 52.256,41.945 54.027,41.945 55.799,41.945 50.485,41.968 53.154,41.956 54.96,41.956 49.662,41.983 36.3,42.018 39.272,42.018 37.265,42.035 38.228,42.027 41.793,42.1 65.174,42.231 66.139,42.248 67.102,42.24 36.785,42.418 38.714,42.427 39.757,42.418 37.75,42.435 41.385,42.511 42.211,42.512 64.689,42.631 65.654,42.648 66.617,42.64 36.3,42.818 37.265,42.835 38.228,42.827 39.272,42.818 41.795,42.968 65.174,43.031 67.102,43.04 66.139,43.048 36.785,43.218 37.75,43.235 38.714,43.227 39.757,43.218 41.385,43.426 42.199,43.426 64.689,43.431 66.617,43.44 61.153,43.468 65.654,43.448 59.365,43.476 36.3,43.618 39.272,43.618 37.265,43.635 38.228,43.627 41.821,43.848 65.174,43.831 66.139,43.848 67.102,43.84 58.874,43.907 59.857,43.907 60.663,43.907 61.609,43.907 36.785,44.018 38.714,44.027 39.757,44.018 37.75,44.035 41.374,44.209 42.275,44.218 64.689,44.231 65.654,44.248 66.617,44.24 36.3,44.418 37.265,44.435 38.228,44.427 39.272,44.418
VIN: R12.1 U3.3 | length 7.7
  Signal w0.5: v1(46.875,35.902) 46.875,41.51 v1(47.044,41.679)
  Bottom Layer w0.5: U3.3 46.122,34.992 46.875,35.745 v1(46.875,35.902)
  other v1: 47.884,41.679 47.478,42.097 47.07,42.508 47.896,42.508 47.48,42.964 47.07,43.422 47.884,43.422 47.506,43.845 47.059,44.206 47.955,44.253
pads on no net: U1.1 U1.2 U1.3 U1.8 U1.9 U1.11 U1.12 U1.16 U1.21 U1.22 U1.23 U1.24 U1.25 U1.26 U1.27 U1.30 U1.31 U1.33 U1.34 U1.37 U1.38 U1.39 U1.40 U1.41 U1.44 U1.47 U1.48 U2.5 U2.7 U2.8 U2.25 U4.4

## Polygon pours and split planes (outlines as drawn)
VIN on Top Layer "VIN_L01_P037" (solid, remove dead copper, pour order 37): 46.588,44.789 48.416,44.789 48.416,40.931 46.588,40.931
PHASE_A on Top Layer "PHASE_A_L01_P019" (solid, pour order 19): 63.138,45.791 63.16,45.769 84.838,45.769 84.838,39.461 84.521,39.144 63.138,39.144
VBAT on Top Layer "VBAT_L01_P002" (solid, remove dead copper, pour order 2): 58.578,28.488 61.812,28.488 61.812,27.389 58.578,27.389
VBAT on Top Layer "VBAT_L01_P003" (solid, remove dead copper, pour order 3): 58.605,35.474 61.966,35.474 61.966,34.255 58.605,34.255
GND on Top Layer "GND_L01_P005" (solid, remove dead copper, pour order 5): 71.945,31.151 73.729,31.151 73.729,27.67 71.945,27.67
GND on Top Layer "GND_L01_P007" (solid, remove dead copper, pour order 7): 72.051,45.28 73.615,45.28 73.615,41.727 72.051,41.727
GND on Top Layer "GND_L01_P010" (solid, remove dead copper, pour order 10): 72.032,38.205 73.649,38.205 73.649,34.692 73.64,34.683 72.032,34.683
VBAT on Top Layer "VBAT_L01_P036" (solid, remove dead copper, pour order 36): 58.6,44.22 61.961,44.22 61.961,43.163 58.6,43.163
3V3 on Top Layer "3V3_L01_P027" (solid, pour order 27): 42.338,31.366 43.825,31.366 43.825,30.016 42.327,30.016
VBAT on Top Layer "VBAT_L01_P031" (solid, remove dead copper, pour order 31): 63.302,31.039 63.303,31.039 68.019,31.039 68.019,26.398 68.033,26.384 63.294,26.384
VBAT on Top Layer "VBAT_L01_P030" (solid, remove dead copper, pour order 30): 63.121,38.283 68.102,38.283 68.102,33.383 63.111,33.383
VBAT on Top Layer "VBAT_L01_P029" (solid, remove dead copper, pour order 29): 63.266,45.33 68.102,45.33 68.102,40.43 63.257,40.43
VBAT on Top Layer "VBAT_L01_P013" (solid, remove dead copper, pour order 13): 49.324,42.385 49.324,41.263 49.324,41.222 56.25,41.222 56.25,42.362 56.232,42.379
3V3 on Top Layer "3V3_L01_P014" (solid, remove dead copper, pour order 14): 49.31,45.468 49.311,45.72 56.073,45.72 56.073,44.651 56.058,44.636 49.305,44.636
GND on Top Layer "GND_L01_P025" (solid, remove dead copper, pour order 25): 35,40.192 42.535,40.192 42.572,40.228 42.572,45.773 63.12,45.773 63.116,45.769 63.116,25.901 35.115,25.901 35,26.015
VBAT on Top Layer "VBAT_L01_P020" (solid, remove dead copper, pour order 20): 34.95,45.799 34.976,45.773 42.572,45.773 42.572,40.155 42.535,40.192 35,40.192
PHASE_C on Top Layer "PHASE_C_L01_P016" (solid, pour order 16): 63.116,32.244 84.816,32.244 84.816,25.913 84.803,25.901 63.116,25.901
PHASE_B on Top Layer "PHASE_B_L01_P018" (solid, remove dead copper, pour order 18): 63.107,39.144 84.807,39.144 84.807,32.631 84.351,32.174 63.107,32.174
GND on GND1 "GND_L02_P011" (solid, remove dead copper, pour order 11): 34.976,45.773 34.98,45.769 84.838,45.769 84.838,25.935 84.816,25.913 84.714,26.015 35,26.015
GND on GND2 "GND_L05_P012" (solid, remove dead copper, pour order 12): 34.98,45.769 84.838,45.769 84.827,45.758 84.827,25.924 35.091,25.924 35.058,25.958
PHASE_A on Bottom Layer "PHASE_A_L06_P034" (solid, remove dead copper, pour order 34): 63.768,45.695 63.768,39.103 84.977,39.103 84.865,39.214 84.865,45.681
PHASE_B on Bottom Layer "PHASE_B_L06_P033" (solid, remove dead copper, pour order 33): 63.794,39.071 63.794,32.478 85.002,32.478 84.891,32.59 84.891,39.057
PHASE_C on Bottom Layer "PHASE_C_L06_P032" (solid, remove dead copper, pour order 32): 63.794,32.493 63.794,25.901 85.002,25.901 84.891,26.012 84.891,32.479
GND on Bottom Layer "GND_L06_P017" (solid, remove dead copper, pour order 17): 34.988,35.894 35,35.882 35,26.015 54.713,26.015 59.38,25.901 63.771,25.901 63.771,45.773 46.473,45.773 46.62,45.626 46.62,30.016 40.5,30.016 40.5,35.894
VBAT on Bottom Layer "VBAT_L06_P015" (solid, remove dead copper, pour order 15): 34.988,35.894 35,35.882 40.5,35.882 40.5,30.154 46.473,30.154 46.473,45.773 40.961,45.773 40.927,45.773 34.983,45.773
VBAT on Power "VBAT_L04_P028" (solid, remove dead copper, pour order 28): 34.963,45.786 34.991,45.758 84.827,45.758 84.827,25.946 84.758,26.015 35,26.015

## Other copper
Top Layer:
  region net PHASE_C: 78.805,30.313 78.095,30.313 78.095,29.718 78.805,29.718 78.805,29.083 78.095,29.083 78.095,28.448 78.805,28.448 78.805,27.813 78.095,27.813 78.095,27.178 78.805,27.178 78.805,26.555 77.785,26.555 77.785,26.86 74.285,26.86 74.285,30.67 77.785,30.67 77.785,30.975 78.805,30.975
  region net VBAT: 63.366,41.312 64.076,41.312 64.076,41.907 63.366,41.907 63.366,42.542 64.076,42.542 64.076,43.177 63.366,43.177 63.366,43.812 64.076,43.812 64.076,44.447 63.366,44.447 63.366,45.07 64.386,45.07 64.386,44.765 67.886,44.765 67.886,40.955 64.386,40.955 64.386,40.65 63.366,40.65
  region net VBAT: 63.366,34.285 64.076,34.285 64.076,34.88 63.366,34.88 63.366,35.515 64.076,35.515 64.076,36.15 63.366,36.15 63.366,36.785 64.076,36.785 64.076,37.42 63.366,37.42 63.366,38.043 64.386,38.043 64.386,37.738 67.886,37.738 67.886,33.928 64.386,33.928 64.386,33.623 63.366,33.623
  region net VBAT: 63.366,27.218 64.076,27.218 64.076,27.813 63.366,27.813 63.366,28.448 64.076,28.448 64.076,29.083 63.366,29.083 63.366,29.718 64.076,29.718 64.076,30.353 63.366,30.353 63.366,30.975 64.386,30.975 64.386,30.67 67.886,30.67 67.886,26.86 64.386,26.86 64.386,26.555 63.366,26.555
  region net PHASE_B: 78.805,37.38 78.095,37.38 78.095,36.785 78.805,36.785 78.805,36.15 78.095,36.15 78.095,35.515 78.805,35.515 78.805,34.88 78.095,34.88 78.095,34.245 78.805,34.245 78.805,33.623 77.785,33.623 77.785,33.928 74.285,33.928 74.285,37.738 77.785,37.738 77.785,38.043 78.805,38.043
  region net PHASE_A: 78.805,44.428 78.095,44.428 78.095,43.833 78.805,43.833 78.805,43.198 78.095,43.198 78.095,42.563 78.805,42.563 78.805,41.928 78.095,41.928 78.095,41.293 78.805,41.293 78.805,40.67 77.785,40.67 77.785,40.975 74.285,40.975 74.285,44.785 77.785,44.785 77.785,45.09 78.805,45.09

## Silkscreen, mask and mechanical layers (free items; w line width, h text height)
Top Overlay:
  lines w0.254: 40.959,26.288 40.959,27.697 cw(c40.974,27.697) 40.974,27.713 47.648,27.713 cw(c47.648,27.701) 47.66,27.701 47.66,26.256
  text "G" at 41.496,28 h1.5
Bottom Overlay:
  drawing of 17 lines, arcs and shapes, not listed
  text "BAT" at 40.674,41.275 h4
  text "AM32 ESC" at 63.918,36.863 h3
  text "GND" at 40.699,27.405 h4
  text "Jakub Konior" at 62.678,26.664 h1
  text "REV v1.0 05.09.2026" at 62.66,26.171 h0.7
Board_Outline:
  lines w0.254: 83.453,45.773 36.523,45.773 ccw(c36.523,44.25) 35,44.25 35,27.5 ccw(c36.599,27.5) 36.599,25.901 83.549,25.901 ccw(c83.549,27.171) 84.819,27.171 84.819,29.804 ccw(c83.549,29.804) 83.549,31.074 83.455,31.074 82.101,31.074 cw(c82.101,32.174) 81.001,32.174 cw(c82.092,32.174) 82.092,33.266 83.533,33.266 ccw(c83.533,34.536) 84.803,34.536 84.803,37.18 ccw(c83.555,37.18) 83.555,38.428 81.964,38.428 cw(c81.964,39.391) 81.001,39.391 81.001,39.611 cw(c81.964,39.611) 81.964,40.574 83.555,40.574 ccw(c83.555,41.844) 84.825,41.844 84.825,44.505 ccw(c83.555,44.505) 83.555,45.775 83.455,45.775
Dimensions:
  lines w0.254: 36.521,25.901 83.628,25.901 ; 36.599,25.901 cw(c36.599,27.5) 35,27.5 35,44.25 cw(c36.523,44.25) 36.523,45.773 83.555,45.773 cw(c83.555,44.503) 84.825,44.503 84.825,41.839 cw(c83.555,41.839) 83.555,40.569 81.959,40.569 ccw(c81.959,39.611) 81.001,39.611 81.001,39.391 ccw(c81.964,39.391) 81.964,38.428 83.555,38.428 cw(c83.555,37.18) 84.803,37.18 84.803,34.536 cw(c83.533,34.536) 83.533,33.266 82.092,33.266 ccw(c82.092,32.174) 81.001,32.174 ccw(c82.101,32.174) 82.101,31.074 83.621,31.074 ; 83.549,25.901 ccw(c83.549,27.171) 84.819,27.171 84.819,29.866 ccw(c83.612,29.866) 83.612,31.074

## Text inside footprints (layer, text, board x,y; h text height)
U4: Bottom Assembly "*" at 43.903,39.979 h1.27 r180